# Altium PCB EMG_MainBoard_Layout.PcbDoc (part 5 of 6)
Units mm, origin at the board's own origin, x right, y up, seen from the top; angles counter-clockwise.
Board outline 75 x 40 mm, 4 copper layers (L1 TOP, L2 GND, L3 POWER SIGNAL, L4 BOTTOM GND), stack 1.164 mm thick; 231 components, 136 nets, 808 pads, 80 vias.
Unrouted connection lines stored in the file: 570.
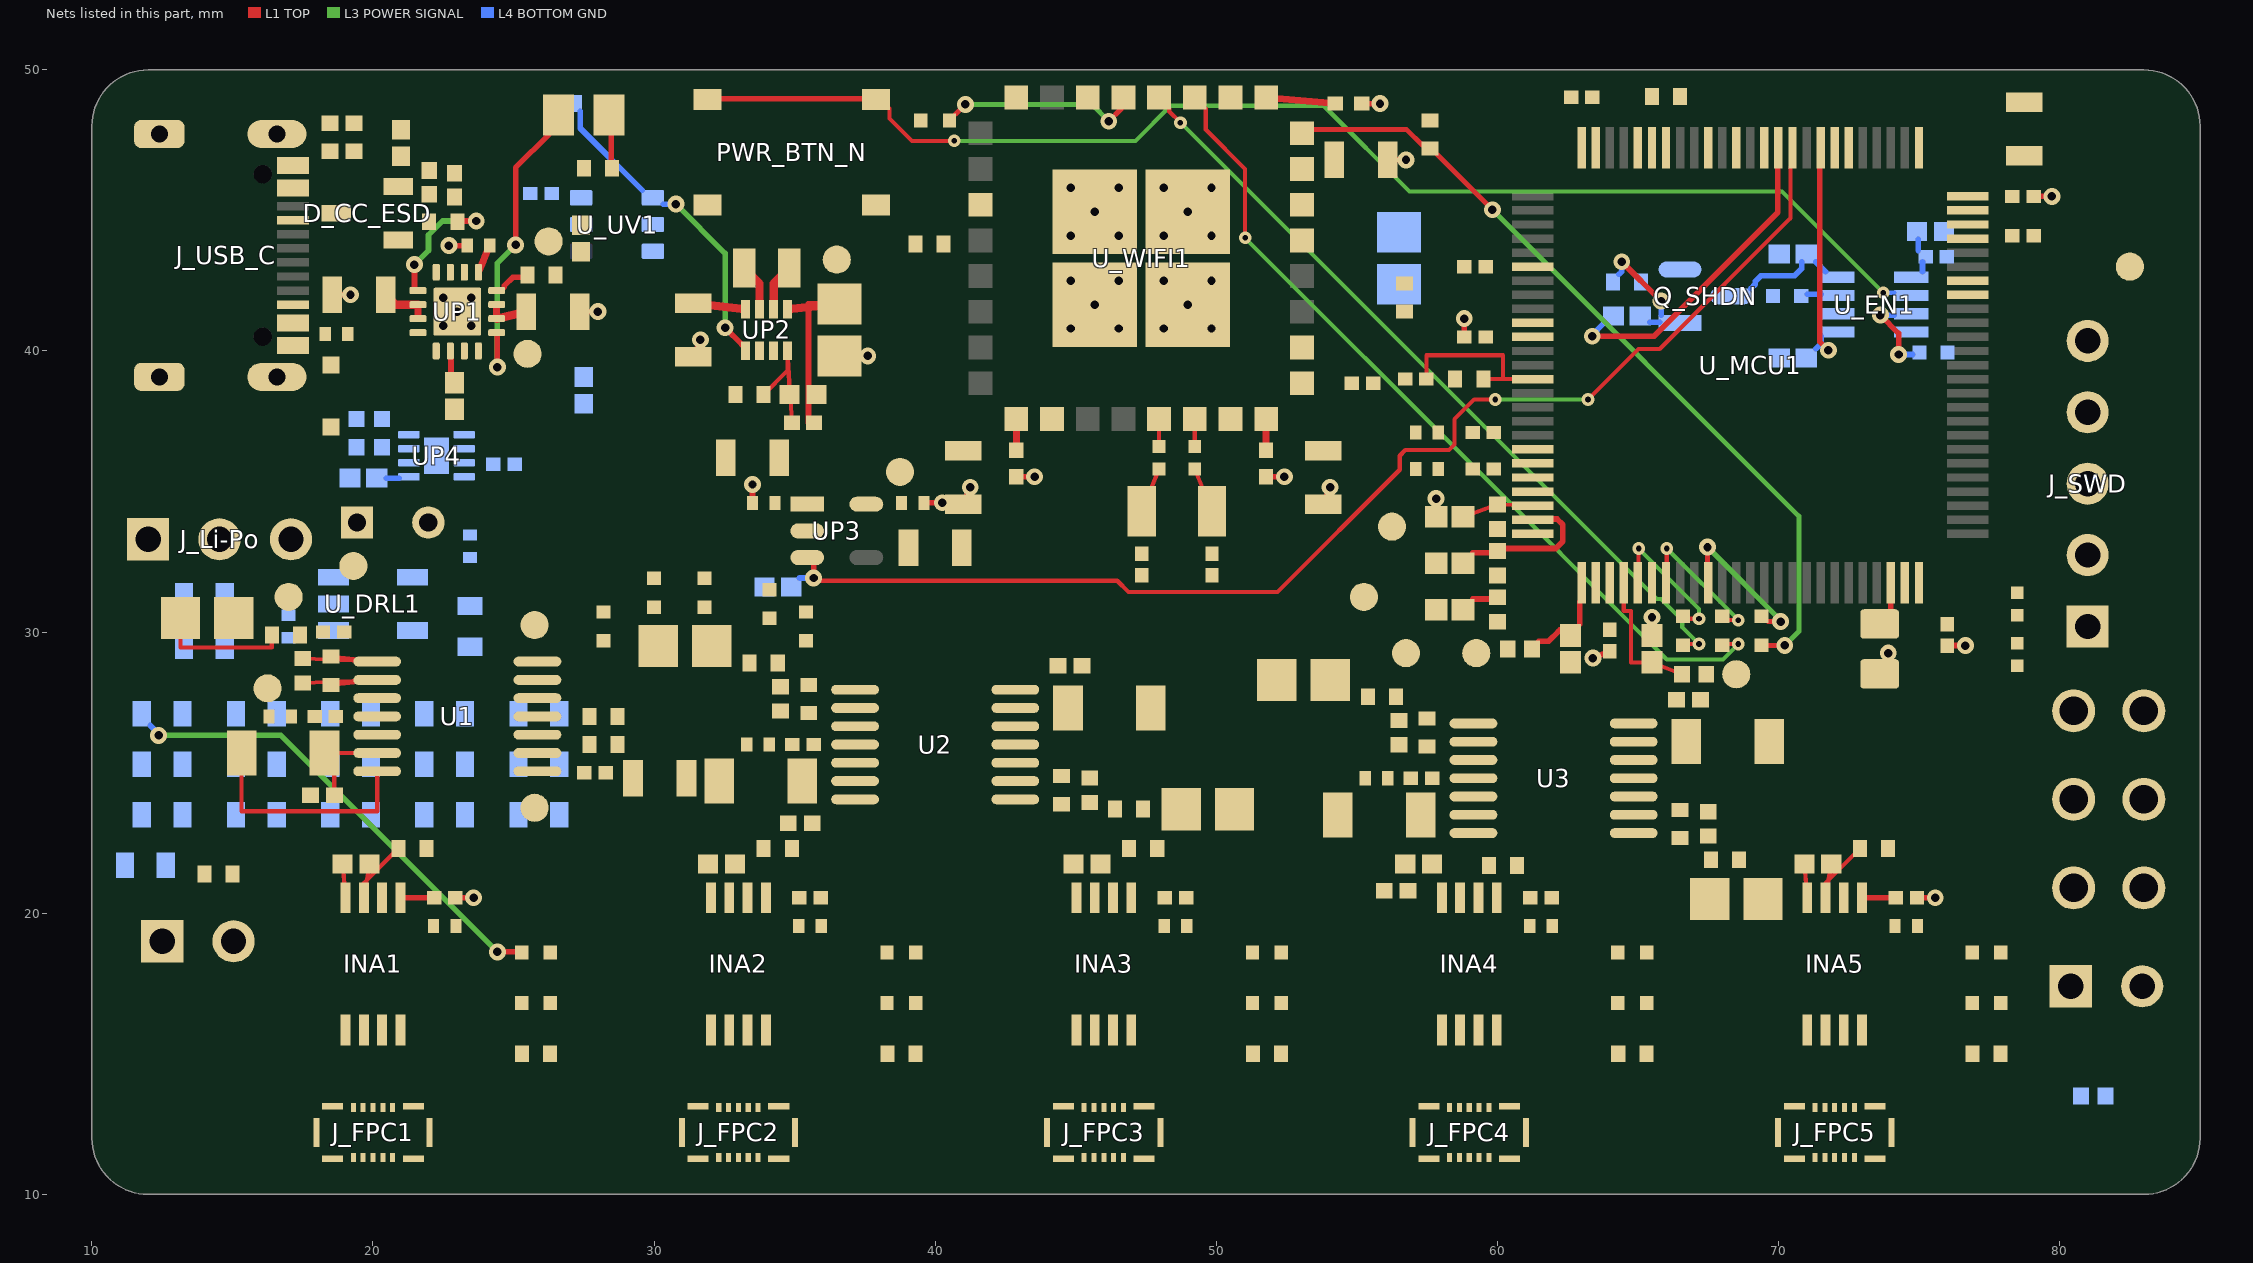
[diagram p5: the nets of this part, all layers, seen from the top]

## Part data (continued)
RDD14: library part EMG_R5_RDD14, "-55℃~+155℃ 50V 5kΩ 63mW Thin Film Resistor ±0.1% ±25ppm/℃ 0402 Chip Resistor - Surface Mount ROH", LCSC Part=C5948099, Manufacturer="Viking Tech", Package=AR0402, Power Rating=0.0625W, Resistance=5KΩ, Temperature="-55°C to +155°C", Temperature Range High=+155°C, Temperature Range Low=-55°C, Tolerance=±0.1%, Voltage Rating=50V, Automotive=No, Automotive Grade="Grade 0", Category="Resistors/Chip Resistor - Surface Mount", ComponentLink2Description=Datasheet, ComponentLink2URL=https://www.viking.com.tw/Templates/att/Thin%20Film%20Resistor%20short%20form.pdf, Composition="Thin Film", Controlled Revision="R5 2026-09-16; project-local frozen symbol/footprint", Device Class L1="Passive Components", Device Class L2=Resistors, Device Class L3="Chip SMD Resistors", Footprint Url=https://www.viking.com.tw/Templates/att/Thin%20Film%20Resistor%20short%20form.pdf, Height=0.35mm, Ipc Land Pattern Name=RESC10050X32, Lead Free=Yes, Manufacturer Part Number=AR02BTC5001, Octopart=https://octopart.com/datasheet/viking-tech/AR02BTC5001, RoHS=TRUE, Series=AR
RDD15: library part EMG_R5_RDD15, Package=None, Availability=Unavailable, Controlled Revision="R5 2026-09-16; project-local frozen symbol/footprint", MP=ERA2ARB103X, Price=None
RG_1: library part EMG_R5_RG_1, "RES SMD 80.6KOHM 0.1% 1/16W 0402", Manufacturer=Yageo, Package=RT0402, Power Rating=0.063W, Resistance=80.6KΩ, Temperature="-55°C to +155°C", Temperature Coefficient="25 ppm/°C", Temperature Range High=+155°C, Temperature Range Low=-55°C, Tolerance=0.001, Voltage Rating=50V, Automotive=No, Category=Res, ComponentLink2Description=Datasheet, ComponentLink2URL=http://www.yageo.com/documents/recent/PYu-RT_1-to-0.01_RoHS_L_9.pdf, Composition="Thin Film", Controlled Revision="R5 2026-09-16; project-local frozen symbol/footprint", Device Class L1="Passive Components", Device Class L2=Resistors, Device Class L3="Chip SMD Resistors", Digikey Description="RES SMD 80.6KOHM 0.1% 1/16W 0402", Footprint Url=http://www.yageo.com/exep/pages/download/literatures/PYu-R_Mount_10.pdf, Height=0.35mm, Ipc Land Pattern Name=RESC10050X30, Lead Free=Yes, Manufacturer Part Number=RT0402BRD0780K6L, Mouser Description="Thin Film Resistors 1/16W 80.6K ohm .1% 25ppm", Octopart=https://octopart.com/rt0402brd0780k6l-yageo-1468076, RoHS=TRUE, Series=RT
RG_2: library part EMG_R5_RG_2, "RES SMD 80.6KOHM 0.1% 1/16W 0402", Manufacturer=Yageo, Package=RT0402, Power Rating=0.063W, Resistance=80.6KΩ, Temperature="-55°C to +155°C", Temperature Coefficient="25 ppm/°C", Temperature Range High=+155°C, Temperature Range Low=-55°C, Tolerance=0.001, Voltage Rating=50V, Automotive=No, Category=Res, ComponentLink2Description=Datasheet, ComponentLink2URL=http://www.yageo.com/documents/recent/PYu-RT_1-to-0.01_RoHS_L_9.pdf, Composition="Thin Film", Controlled Revision="R5 2026-09-16; project-local frozen symbol/footprint", Device Class L1="Passive Components", Device Class L2=Resistors, Device Class L3="Chip SMD Resistors", Digikey Description="RES SMD 80.6KOHM 0.1% 1/16W 0402", Footprint Url=http://www.yageo.com/exep/pages/download/literatures/PYu-R_Mount_10.pdf, Height=0.35mm, Ipc Land Pattern Name=RESC10050X30, Lead Free=Yes, Manufacturer Part Number=RT0402BRD0780K6L, Mouser Description="Thin Film Resistors 1/16W 80.6K ohm .1% 25ppm", Octopart=https://octopart.com/rt0402brd0780k6l-yageo-1468076, RoHS=TRUE, Series=RT
RG_3: library part EMG_R5_RG_3, "RES SMD 80.6KOHM 0.1% 1/16W 0402", Manufacturer=Yageo, Package=RT0402, Power Rating=0.063W, Resistance=80.6KΩ, Temperature="-55°C to +155°C", Temperature Coefficient="25 ppm/°C", Temperature Range High=+155°C, Temperature Range Low=-55°C, Tolerance=0.001, Voltage Rating=50V, Automotive=No, Category=Res, ComponentLink2Description=Datasheet, ComponentLink2URL=http://www.yageo.com/documents/recent/PYu-RT_1-to-0.01_RoHS_L_9.pdf, Composition="Thin Film", Controlled Revision="R5 2026-09-16; project-local frozen symbol/footprint", Device Class L1="Passive Components", Device Class L2=Resistors, Device Class L3="Chip SMD Resistors", Digikey Description="RES SMD 80.6KOHM 0.1% 1/16W 0402", Footprint Url=http://www.yageo.com/exep/pages/download/literatures/PYu-R_Mount_10.pdf, Height=0.35mm, Ipc Land Pattern Name=RESC10050X30, Lead Free=Yes, Manufacturer Part Number=RT0402BRD0780K6L, Mouser Description="Thin Film Resistors 1/16W 80.6K ohm .1% 25ppm", Octopart=https://octopart.com/rt0402brd0780k6l-yageo-1468076, RoHS=TRUE, Series=RT
RG_4: library part EMG_R5_RG_4, "RES SMD 80.6KOHM 0.1% 1/16W 0402", Manufacturer=Yageo, Package=RT0402, Power Rating=0.063W, Resistance=80.6KΩ, Temperature="-55°C to +155°C", Temperature Coefficient="25 ppm/°C", Temperature Range High=+155°C, Temperature Range Low=-55°C, Tolerance=0.001, Voltage Rating=50V, Automotive=No, Category=Res, ComponentLink2Description=Datasheet, ComponentLink2URL=http://www.yageo.com/documents/recent/PYu-RT_1-to-0.01_RoHS_L_9.pdf, Composition="Thin Film", Controlled Revision="R5 2026-09-16; project-local frozen symbol/footprint", Device Class L1="Passive Components", Device Class L2=Resistors, Device Class L3="Chip SMD Resistors", Digikey Description="RES SMD 80.6KOHM 0.1% 1/16W 0402", Footprint Url=http://www.yageo.com/exep/pages/download/literatures/PYu-R_Mount_10.pdf, Height=0.35mm, Ipc Land Pattern Name=RESC10050X30, Lead Free=Yes, Manufacturer Part Number=RT0402BRD0780K6L, Mouser Description="Thin Film Resistors 1/16W 80.6K ohm .1% 25ppm", Octopart=https://octopart.com/rt0402brd0780k6l-yageo-1468076, RoHS=TRUE, Series=RT
RG_5: library part EMG_R5_RG_5, "RES SMD 80.6KOHM 0.1% 1/16W 0402", Manufacturer=Yageo, Package=RT0402, Power Rating=0.063W, Resistance=80.6KΩ, Temperature="-55°C to +155°C", Temperature Coefficient="25 ppm/°C", Temperature Range High=+155°C, Temperature Range Low=-55°C, Tolerance=0.001, Voltage Rating=50V, Automotive=No, Category=Res, ComponentLink2Description=Datasheet, ComponentLink2URL=http://www.yageo.com/documents/recent/PYu-RT_1-to-0.01_RoHS_L_9.pdf, Composition="Thin Film", Controlled Revision="R5 2026-09-16; project-local frozen symbol/footprint", Device Class L1="Passive Components", Device Class L2=Resistors, Device Class L3="Chip SMD Resistors", Digikey Description="RES SMD 80.6KOHM 0.1% 1/16W 0402", Footprint Url=http://www.yageo.com/exep/pages/download/literatures/PYu-R_Mount_10.pdf, Height=0.35mm, Ipc Land Pattern Name=RESC10050X30, Lead Free=Yes, Manufacturer Part Number=RT0402BRD0780K6L, Mouser Description="Thin Film Resistors 1/16W 80.6K ohm .1% 25ppm", Octopart=https://octopart.com/rt0402brd0780k6l-yageo-1468076, RoHS=TRUE, Series=RT
RGN_1: library part EMG_R5_RGN_1, "RES 10.0K OHM 1/16W .1% SMD 0402", Manufacturer=Yageo, Package=RT0402, Power Rating=0.063W, Resistance=10KΩ, Temperature="-55°C to +155°C", Temperature Coefficient="25 ppm/°C", Temperature Range High=+155°C, Temperature Range Low=-55°C, Tolerance=0.001, Voltage Rating=50V, Automotive=No, Category=Res, ComponentLink2Description=Datasheet, ComponentLink2URL=http://www.yageo.com/documents/recent/PYu-RT_1-to-0.01_RoHS_L_9.pdf, Composition="Thin Film", Controlled Revision="R5 2026-09-16; project-local frozen symbol/footprint", Device Class L1="Passive Components", Device Class L2=Resistors, Device Class L3="Chip SMD Resistors", Digikey Description="RES 10.0K OHM 1/16W .1% SMD 0402", Footprint Url=http://www.yageo.com/exep/pages/download/literatures/PYu-R_Mount_10.pdf, Height=0.35mm, Ipc Land Pattern Name=RESC10050X30, Lead Free=Yes, Manufacturer Part Number=RT0402BRD0710KL, Mouser Description="Thin Film Resistors - SMD 10K ohm 0.1% 1/16W", Octopart=https://octopart.com/rt0402brd0710kl-yageo-1181432, RoHS=TRUE, Series=RT
RGN_2: library part EMG_R5_RGN_2, "RES 10.0K OHM 1/16W .1% SMD 0402", Manufacturer=Yageo, Package=RT0402, Power Rating=0.063W, Resistance=10KΩ, Temperature="-55°C to +155°C", Temperature Coefficient="25 ppm/°C", Temperature Range High=+155°C, Temperature Range Low=-55°C, Tolerance=0.001, Voltage Rating=50V, Automotive=No, Category=Res, ComponentLink2Description=Datasheet, ComponentLink2URL=http://www.yageo.com/documents/recent/PYu-RT_1-to-0.01_RoHS_L_9.pdf, Composition="Thin Film", Controlled Revision="R5 2026-09-16; project-local frozen symbol/footprint", Device Class L1="Passive Components", Device Class L2=Resistors, Device Class L3="Chip SMD Resistors", Digikey Description="RES 10.0K OHM 1/16W .1% SMD 0402", Footprint Url=http://www.yageo.com/exep/pages/download/literatures/PYu-R_Mount_10.pdf, Height=0.35mm, Ipc Land Pattern Name=RESC10050X30, Lead Free=Yes, Manufacturer Part Number=RT0402BRD0710KL, Mouser Description="Thin Film Resistors - SMD 10K ohm 0.1% 1/16W", Octopart=https://octopart.com/rt0402brd0710kl-yageo-1181432, RoHS=TRUE, Series=RT
RGN_3: library part EMG_R5_RGN_3, "RES 10.0K OHM 1/16W .1% SMD 0402", Manufacturer=Yageo, Package=RT0402, Power Rating=0.063W, Resistance=10KΩ, Temperature="-55°C to +155°C", Temperature Coefficient="25 ppm/°C", Temperature Range High=+155°C, Temperature Range Low=-55°C, Tolerance=0.001, Voltage Rating=50V, Automotive=No, Category=Res, ComponentLink2Description=Datasheet, ComponentLink2URL=http://www.yageo.com/documents/recent/PYu-RT_1-to-0.01_RoHS_L_9.pdf, Composition="Thin Film", Controlled Revision="R5 2026-09-16; project-local frozen symbol/footprint", Device Class L1="Passive Components", Device Class L2=Resistors, Device Class L3="Chip SMD Resistors", Digikey Description="RES 10.0K OHM 1/16W .1% SMD 0402", Footprint Url=http://www.yageo.com/exep/pages/download/literatures/PYu-R_Mount_10.pdf, Height=0.35mm, Ipc Land Pattern Name=RESC10050X30, Lead Free=Yes, Manufacturer Part Number=RT0402BRD0710KL, Mouser Description="Thin Film Resistors - SMD 10K ohm 0.1% 1/16W", Octopart=https://octopart.com/rt0402brd0710kl-yageo-1181432, RoHS=TRUE, Series=RT
RGN_4: library part EMG_R5_RGN_4, "RES 10.0K OHM 1/16W .1% SMD 0402", Manufacturer=Yageo, Package=RT0402, Power Rating=0.063W, Resistance=10KΩ, Temperature="-55°C to +155°C", Temperature Coefficient="25 ppm/°C", Temperature Range High=+155°C, Temperature Range Low=-55°C, Tolerance=0.001, Voltage Rating=50V, Automotive=No, Category=Res, ComponentLink2Description=Datasheet, ComponentLink2URL=http://www.yageo.com/documents/recent/PYu-RT_1-to-0.01_RoHS_L_9.pdf, Composition="Thin Film", Controlled Revision="R5 2026-09-16; project-local frozen symbol/footprint", Device Class L1="Passive Components", Device Class L2=Resistors, Device Class L3="Chip SMD Resistors", Digikey Description="RES 10.0K OHM 1/16W .1% SMD 0402", Footprint Url=http://www.yageo.com/exep/pages/download/literatures/PYu-R_Mount_10.pdf, Height=0.35mm, Ipc Land Pattern Name=RESC10050X30, Lead Free=Yes, Manufacturer Part Number=RT0402BRD0710KL, Mouser Description="Thin Film Resistors - SMD 10K ohm 0.1% 1/16W", Octopart=https://octopart.com/rt0402brd0710kl-yageo-1181432, RoHS=TRUE, Series=RT
RGN_5: library part EMG_R5_RGN_5, "RES 10.0K OHM 1/16W .1% SMD 0402", Manufacturer=Yageo, Package=RT0402, Power Rating=0.063W, Resistance=10KΩ, Temperature="-55°C to +155°C", Temperature Coefficient="25 ppm/°C", Temperature Range High=+155°C, Temperature Range Low=-55°C, Tolerance=0.001, Voltage Rating=50V, Automotive=No, Category=Res, ComponentLink2Description=Datasheet, ComponentLink2URL=http://www.yageo.com/documents/recent/PYu-RT_1-to-0.01_RoHS_L_9.pdf, Composition="Thin Film", Controlled Revision="R5 2026-09-16; project-local frozen symbol/footprint", Device Class L1="Passive Components", Device Class L2=Resistors, Device Class L3="Chip SMD Resistors", Digikey Description="RES 10.0K OHM 1/16W .1% SMD 0402", Footprint Url=http://www.yageo.com/exep/pages/download/literatures/PYu-R_Mount_10.pdf, Height=0.35mm, Ipc Land Pattern Name=RESC10050X30, Lead Free=Yes, Manufacturer Part Number=RT0402BRD0710KL, Mouser Description="Thin Film Resistors - SMD 10K ohm 0.1% 1/16W", Octopart=https://octopart.com/rt0402brd0710kl-yageo-1181432, RoHS=TRUE, Series=RT
RH_1: library part EMG_R5_RH_1, "RES 26.1kΩ ±0.1% 0.063W 0402", Case Code (Imperial)=0402, Case Code (Metric)=1005, JLCPCB Part=C2075472, Manufacturer=PANASONIC, Max Operating Temperature=155°C, Max Power Dissipation=63mW, Min Operating Temperature=-55°C, Power Rating=62.5mW, Resistance=26.1kR, Resistor Type="Thin Film", Temperature Coefficient=25ppm/°C, Tolerance=0.1%, Voltage Rating=50V, Case/Package=0402, Controlled Revision="R5 2026-09-16; project-local frozen symbol/footprint", Features="Moisture Resistant", Height=0.015inch, Length=0.039inch, Number of Terminations=2, Packaging="Tape and Reel", RoHS Compliant=Yes, Series=ERA-2A, Termination=SMD/SMT, Width=0.5mm
RH_2: library part EMG_R5_RH_2, "RES 26.1kΩ ±0.1% 0.063W 0402", Case Code (Imperial)=0402, Case Code (Metric)=1005, JLCPCB Part=C2075472, Manufacturer=PANASONIC, Max Operating Temperature=155°C, Max Power Dissipation=63mW, Min Operating Temperature=-55°C, Power Rating=62.5mW, Resistance=26.1kR, Resistor Type="Thin Film", Temperature Coefficient=25ppm/°C, Tolerance=0.1%, Voltage Rating=50V, Case/Package=0402, Controlled Revision="R5 2026-09-16; project-local frozen symbol/footprint", Features="Moisture Resistant", Height=0.015inch, Length=0.039inch, Number of Terminations=2, Packaging="Tape and Reel", RoHS Compliant=Yes, Series=ERA-2A, Termination=SMD/SMT, Width=0.5mm
RH_3: library part EMG_R5_RH_3, "RES 26.1kΩ ±0.1% 0.063W 0402", Case Code (Imperial)=0402, Case Code (Metric)=1005, JLCPCB Part=C2075472, Manufacturer=PANASONIC, Max Operating Temperature=155°C, Max Power Dissipation=63mW, Min Operating Temperature=-55°C, Power Rating=62.5mW, Resistance=26.1kR, Resistor Type="Thin Film", Temperature Coefficient=25ppm/°C, Tolerance=0.1%, Voltage Rating=50V, Case/Package=0402, Controlled Revision="R5 2026-09-16; project-local frozen symbol/footprint", Features="Moisture Resistant", Height=0.015inch, Length=0.039inch, Number of Terminations=2, Packaging="Tape and Reel", RoHS Compliant=Yes, Series=ERA-2A, Termination=SMD/SMT, Width=0.5mm
RH_4: library part EMG_R5_RH_4, "RES 26.1kΩ ±0.1% 0.063W 0402", Case Code (Imperial)=0402, Case Code (Metric)=1005, JLCPCB Part=C2075472, Manufacturer=PANASONIC, Max Operating Temperature=155°C, Max Power Dissipation=63mW, Min Operating Temperature=-55°C, Power Rating=62.5mW, Resistance=26.1kR, Resistor Type="Thin Film", Temperature Coefficient=25ppm/°C, Tolerance=0.1%, Voltage Rating=50V, Case/Package=0402, Controlled Revision="R5 2026-09-16; project-local frozen symbol/footprint", Features="Moisture Resistant", Height=0.015inch, Length=0.039inch, Number of Terminations=2, Packaging="Tape and Reel", RoHS Compliant=Yes, Series=ERA-2A, Termination=SMD/SMT, Width=0.5mm
RH_5: library part EMG_R5_RH_5, "RES 26.1kΩ ±0.1% 0.063W 0402", Case Code (Imperial)=0402, Case Code (Metric)=1005, JLCPCB Part=C2075472, Manufacturer=PANASONIC, Max Operating Temperature=155°C, Max Power Dissipation=63mW, Min Operating Temperature=-55°C, Power Rating=62.5mW, Resistance=26.1kR, Resistor Type="Thin Film", Temperature Coefficient=25ppm/°C, Tolerance=0.1%, Voltage Rating=50V, Case/Package=0402, Controlled Revision="R5 2026-09-16; project-local frozen symbol/footprint", Features="Moisture Resistant", Height=0.015inch, Length=0.039inch, Number of Terminations=2, Packaging="Tape and Reel", RoHS Compliant=Yes, Series=ERA-2A, Termination=SMD/SMT, Width=0.5mm
RISET: library part EMG_R5_RISET, Manufacturer=Yageo, Controlled Revision="R5 2026-09-16; project-local frozen symbol/footprint", Part Number=RC0402FR-072K94L
RJ1: library part EMG_R5_RJ1, Manufacturer="Yageo / Phycomp", Controlled Revision="R5 2026-09-16; project-local frozen symbol/footprint", Part Number=RC0402FR-075K1L
RJ2: library part EMG_R5_RJ2, Manufacturer="Yageo / Phycomp", Controlled Revision="R5 2026-09-16; project-local frozen symbol/footprint", Part Number=RC0402FR-075K1L
RL_1: library part EMG_R5_RL_1, "RES SMD 1.07K OHM 0.1% 1/16W", Manufacturer=Yageo, Package=RT0402, Power Rating=0.063W, Resistance=1.07KΩ, Temperature="-55°C to +155°C", Temperature Coefficient="25 ppm/°C", Temperature Range High=+155°C, Temperature Range Low=-55°C, Tolerance=0.001, Voltage Rating=50V, Automotive=No, Category=Res, ComponentLink2Description=Datasheet, ComponentLink2URL=http://www.yageo.com/documents/recent/PYu-RT_1-to-0.01_RoHS_L_9.pdf, Composition="Thin Film", Controlled Revision="R5 2026-09-16; project-local frozen symbol/footprint", Device Class L1="Passive Components", Device Class L2=Resistors, Device Class L3="Chip SMD Resistors", Digikey Description="RES SMD 1.07K OHM 0.1% 1/16W", Footprint Url=http://www.yageo.com/exep/pages/download/literatures/PYu-R_Mount_10.pdf, Height=0.35mm, Ipc Land Pattern Name=RESC10050X30, Lead Free=Yes, Manufacturer Part Number=RT0402BRD071K07L, Mouser Description="Thin Film Resistors 1/16W 1.07K ohm .1% 25ppm", Octopart=https://octopart.com/rt0402brd071k07l-yageo-1400807, RoHS=TRUE, Series=RT
RL_2: library part EMG_R5_RL_2, "RES SMD 1.07K OHM 0.1% 1/16W", Manufacturer=Yageo, Package=RT0402, Power Rating=0.063W, Resistance=1.07KΩ, Temperature="-55°C to +155°C", Temperature Coefficient="25 ppm/°C", Temperature Range High=+155°C, Temperature Range Low=-55°C, Tolerance=0.001, Voltage Rating=50V, Automotive=No, Category=Res, ComponentLink2Description=Datasheet, ComponentLink2URL=http://www.yageo.com/documents/recent/PYu-RT_1-to-0.01_RoHS_L_9.pdf, Composition="Thin Film", Controlled Revision="R5 2026-09-16; project-local frozen symbol/footprint", Device Class L1="Passive Components", Device Class L2=Resistors, Device Class L3="Chip SMD Resistors", Digikey Description="RES SMD 1.07K OHM 0.1% 1/16W", Footprint Url=http://www.yageo.com/exep/pages/download/literatures/PYu-R_Mount_10.pdf, Height=0.35mm, Ipc Land Pattern Name=RESC10050X30, Lead Free=Yes, Manufacturer Part Number=RT0402BRD071K07L, Mouser Description="Thin Film Resistors 1/16W 1.07K ohm .1% 25ppm", Octopart=https://octopart.com/rt0402brd071k07l-yageo-1400807, RoHS=TRUE, Series=RT
RL_3: library part EMG_R5_RL_3, "RES SMD 1.07K OHM 0.1% 1/16W", Manufacturer=Yageo, Package=RT0402, Power Rating=0.063W, Resistance=1.07KΩ, Temperature="-55°C to +155°C", Temperature Coefficient="25 ppm/°C", Temperature Range High=+155°C, Temperature Range Low=-55°C, Tolerance=0.001, Voltage Rating=50V, Automotive=No, Category=Res, ComponentLink2Description=Datasheet, ComponentLink2URL=http://www.yageo.com/documents/recent/PYu-RT_1-to-0.01_RoHS_L_9.pdf, Composition="Thin Film", Controlled Revision="R5 2026-09-16; project-local frozen symbol/footprint", Device Class L1="Passive Components", Device Class L2=Resistors, Device Class L3="Chip SMD Resistors", Digikey Description="RES SMD 1.07K OHM 0.1% 1/16W", Footprint Url=http://www.yageo.com/exep/pages/download/literatures/PYu-R_Mount_10.pdf, Height=0.35mm, Ipc Land Pattern Name=RESC10050X30, Lead Free=Yes, Manufacturer Part Number=RT0402BRD071K07L, Mouser Description="Thin Film Resistors 1/16W 1.07K ohm .1% 25ppm", Octopart=https://octopart.com/rt0402brd071k07l-yageo-1400807, RoHS=TRUE, Series=RT
RL_4: library part EMG_R5_RL_4, "RES SMD 1.07K OHM 0.1% 1/16W", Manufacturer=Yageo, Package=RT0402, Power Rating=0.063W, Resistance=1.07KΩ, Temperature="-55°C to +155°C", Temperature Coefficient="25 ppm/°C", Temperature Range High=+155°C, Temperature Range Low=-55°C, Tolerance=0.001, Voltage Rating=50V, Automotive=No, Category=Res, ComponentLink2Description=Datasheet, ComponentLink2URL=http://www.yageo.com/documents/recent/PYu-RT_1-to-0.01_RoHS_L_9.pdf, Composition="Thin Film", Controlled Revision="R5 2026-09-16; project-local frozen symbol/footprint", Device Class L1="Passive Components", Device Class L2=Resistors, Device Class L3="Chip SMD Resistors", Digikey Description="RES SMD 1.07K OHM 0.1% 1/16W", Footprint Url=http://www.yageo.com/exep/pages/download/literatures/PYu-R_Mount_10.pdf, Height=0.35mm, Ipc Land Pattern Name=RESC10050X30, Lead Free=Yes, Manufacturer Part Number=RT0402BRD071K07L, Mouser Description="Thin Film Resistors 1/16W 1.07K ohm .1% 25ppm", Octopart=https://octopart.com/rt0402brd071k07l-yageo-1400807, RoHS=TRUE, Series=RT
RL_5: library part EMG_R5_RL_5, "RES SMD 1.07K OHM 0.1% 1/16W", Manufacturer=Yageo, Package=RT0402, Power Rating=0.063W, Resistance=1.07KΩ, Temperature="-55°C to +155°C", Temperature Coefficient="25 ppm/°C", Temperature Range High=+155°C, Temperature Range Low=-55°C, Tolerance=0.001, Voltage Rating=50V, Automotive=No, Category=Res, ComponentLink2Description=Datasheet, ComponentLink2URL=http://www.yageo.com/documents/recent/PYu-RT_1-to-0.01_RoHS_L_9.pdf, Composition="Thin Film", Controlled Revision="R5 2026-09-16; project-local frozen symbol/footprint", Device Class L1="Passive Components", Device Class L2=Resistors, Device Class L3="Chip SMD Resistors", Digikey Description="RES SMD 1.07K OHM 0.1% 1/16W", Footprint Url=http://www.yageo.com/exep/pages/download/literatures/PYu-R_Mount_10.pdf, Height=0.35mm, Ipc Land Pattern Name=RESC10050X30, Lead Free=Yes, Manufacturer Part Number=RT0402BRD071K07L, Mouser Description="Thin Film Resistors 1/16W 1.07K ohm .1% 25ppm", Octopart=https://octopart.com/rt0402brd071k07l-yageo-1400807, RoHS=TRUE, Series=RT
Rservo_1: library part EMG_R5_Rservo_1, Manufacturer="Yageo / Phycomp", Controlled Revision="R5 2026-09-16; project-local frozen symbol/footprint", Part Number=RC0402FR-072ML
Rservo_2: library part EMG_R5_Rservo_2, Manufacturer="Yageo / Phycomp", Controlled Revision="R5 2026-09-16; project-local frozen symbol/footprint", Part Number=RC0402FR-072ML
Rservo_3: library part EMG_R5_Rservo_3, Manufacturer="Yageo / Phycomp", Controlled Revision="R5 2026-09-16; project-local frozen symbol/footprint", Part Number=RC0402FR-072ML
Rservo_4: library part EMG_R5_Rservo_4, Manufacturer="Yageo / Phycomp", Controlled Revision="R5 2026-09-16; project-local frozen symbol/footprint", Part Number=RC0402FR-072ML
Rservo_5: library part EMG_R5_Rservo_5, Manufacturer="Yageo / Phycomp", Controlled Revision="R5 2026-09-16; project-local frozen symbol/footprint", Part Number=RC0402FR-072ML
RUP_3: library part EMG_R5_RUP_3, "RES 560kΩ ±1% 0.063W 0402", Case/Package=0402, Max Operating Temperature=155°C, Max Power Dissipation=63mW, Min Operating Temperature=-55°C, Resistance=560kR, Resistor Type="Thick Film", Temperature Coefficient=100ppm/°C, Tolerance=1%, Controlled Revision="R5 2026-09-16; project-local frozen symbol/footprint", Features="Moisture Resistant", Height=0.015inch, Length=0.039inch, Number of Terminations=2, Packaging="Tape and Reel", RoHS Compliant=Yes, Series=AC, Width=0.02inch
RUP_4: library part EMG_R5_RUP_4, "AC0402 100KΩ 0.0625W 1.00%", Manufacturer=Yageo, Package=AC0402, Power Rating=0.0625W, Resistance=100KΩ, Temperature="-55°C to +155°C", Temperature Range High=+155°C, Temperature Range Low=-55°C, Tolerance=0.01, Voltage Rating=50V, Automotive=Yes, Automotive Grade="Grade 0", Category=Res, ComponentLink2Description=Datasheet, ComponentLink2URL=http://www.yageo.com/documents/recent/PYu-AC_51_RoHS_L_6.pdf, Composition="Thick Film", Controlled Revision="R5 2026-09-16; project-local frozen symbol/footprint", Device Class L1="Passive Components", Device Class L2=Resistors, Device Class L3="Chip SMD Resistors", Footprint Url=http://www.yageo.com/exep/pages/download/literatures/PYu-R_Mount_10.pdf, Height=0.37mm, Ipc Land Pattern Name=RESC10050X32, Lead Free=Yes, Manufacturer Part Number=AC0402FR-7D100KL, Octopart=https://octopart.com/ac0402fr-7d100kl-yageo-91024821, RoHS=TRUE, Series=AC
RV1: library part EMG_R5_RV1, "AC0402 100KΩ 0.0625W 1.00%", Manufacturer=Yageo, Package=AC0402, Power Rating=0.0625W, Resistance=100KΩ, Temperature="-55°C to +155°C", Temperature Range High=+155°C, Temperature Range Low=-55°C, Tolerance=0.01, Voltage Rating=50V, Automotive=Yes, Automotive Grade="Grade 0", Category=Res, ComponentLink2Description=Datasheet, ComponentLink2URL=http://www.yageo.com/documents/recent/PYu-AC_51_RoHS_L_6.pdf, Composition="Thick Film", Controlled Revision="R5 2026-09-16; project-local frozen symbol/footprint", Device Class L1="Passive Components", Device Class L2=Resistors, Device Class L3="Chip SMD Resistors", Footprint Url=http://www.yageo.com/exep/pages/download/literatures/PYu-R_Mount_10.pdf, Height=0.37mm, Ipc Land Pattern Name=RESC10050X32, Lead Free=Yes, Manufacturer Part Number=AC0402FR-7D100KL, Octopart=https://octopart.com/ac0402fr-7d100kl-yageo-91024821, RoHS=TRUE, Series=AC
RV2: library part EMG_R5_RV2, "AC0402 100KΩ 0.0625W 1.00%", Manufacturer=Yageo, Package=AC0402, Power Rating=0.0625W, Resistance=100KΩ, Temperature="-55°C to +155°C", Temperature Range High=+155°C, Temperature Range Low=-55°C, Tolerance=0.01, Voltage Rating=50V, Automotive=Yes, Automotive Grade="Grade 0", Category=Res, ComponentLink2Description=Datasheet, ComponentLink2URL=http://www.yageo.com/documents/recent/PYu-AC_51_RoHS_L_6.pdf, Composition="Thick Film", Controlled Revision="R5 2026-09-16; project-local frozen symbol/footprint", Device Class L1="Passive Components", Device Class L2=Resistors, Device Class L3="Chip SMD Resistors", Footprint Url=http://www.yageo.com/exep/pages/download/literatures/PYu-R_Mount_10.pdf, Height=0.37mm, Ipc Land Pattern Name=RESC10050X32, Lead Free=Yes, Manufacturer Part Number=AC0402FR-7D100KL, Octopart=https://octopart.com/ac0402fr-7d100kl-yageo-91024821, RoHS=TRUE, Series=AC
TP_GND: library part EMG_R5_TP_GND, "UltraLow Profile THM Test Point-No Base", Package=None, Check_prices=https://www.snapeda.com/parts/5021/Keystone/view-part/?ref=eda, Controlled Revision="R5 2026-09-16; project-local frozen symbol/footprint", MF="Keystone Electronics", MP=5021, SnapEDA_Link=https://www.snapeda.com/parts/5021/Keystone/view-part/?ref=snap
TP_MCU_BOOT0: library part EMG_R5_TP_MCU_BOOT0, "UltraLow Profile THM Test Point-No Base", Package=None, Check_prices=https://www.snapeda.com/parts/5021/Keystone/view-part/?ref=eda, Controlled Revision="R5 2026-09-16; project-local frozen symbol/footprint", MF="Keystone Electronics", MP=5021, SnapEDA_Link=https://www.snapeda.com/parts/5021/Keystone/view-part/?ref=snap
TP_WIFI_BOOT: library part EMG_R5_TP_WIFI_BOOT, "UltraLow Profile THM Test Point-No Base", Package=None, Check_prices=https://www.snapeda.com/parts/5021/Keystone/view-part/?ref=eda, Controlled Revision="R5 2026-09-16; project-local frozen symbol/footprint", MF="Keystone Electronics", MP=5021, SnapEDA_Link=https://www.snapeda.com/parts/5021/Keystone/view-part/?ref=snap
TP_WIFI_CHIP_EN: library part EMG_R5_TP_WIFI_CHIP_EN, "UltraLow Profile THM Test Point-No Base", Package=None, Check_prices=https://www.snapeda.com/parts/5021/Keystone/view-part/?ref=eda, Controlled Revision="R5 2026-09-16; project-local frozen symbol/footprint", MF="Keystone Electronics", MP=5021, SnapEDA_Link=https://www.snapeda.com/parts/5021/Keystone/view-part/?ref=snap
TP_WIFI_UART_RX: library part EMG_R5_TP_WIFI_UART_RX, "UltraLow Profile THM Test Point-No Base", Package=None, Check_prices=https://www.snapeda.com/parts/5021/Keystone/view-part/?ref=eda, Controlled Revision="R5 2026-09-16; project-local frozen symbol/footprint", MF="Keystone Electronics", MP=5021, SnapEDA_Link=https://www.snapeda.com/parts/5021/Keystone/view-part/?ref=snap
TP_WIFI_UART_TX: library part EMG_R5_TP_WIFI_UART_TX, "UltraLow Profile THM Test Point-No Base", Package=None, Check_prices=https://www.snapeda.com/parts/5021/Keystone/view-part/?ref=eda, Controlled Revision="R5 2026-09-16; project-local frozen symbol/footprint", MF="Keystone Electronics", MP=5021, SnapEDA_Link=https://www.snapeda.com/parts/5021/Keystone/view-part/?ref=snap
U1: library part EMG_R5_U1, "None", Case/Package=TSSOP, Input Bias Current=100pA, Input Offset Voltage (Vos)=4.5mV, Max Operating Temperature=125°C, Max Supply Voltage=6V, Min Operating Temperature=-40°C, Min Supply Voltage=1.8V, Nominal Supply Current=45uA, Output Current=15mA, Power Supply Rejection Ratio (PSRR)=63dB, Voltage Gain=110dB, Amplifier Type="GENERAL PURPOSE", Common Mode Rejection Ratio=56dB, Controlled Revision="R5 2026-09-16; project-local frozen symbol/footprint", Gain Bandwidth Product=1MHz, Lead Free="Lead Free", Mount="Surface Mount", Number of Channels=4, Number of Circuits=4, Number of Elements=4, Number of Pins=14, Packaging="Tape and Reel", RoHS Compliant=Yes, Slew Rate=0.5V/µs, Supply Current=45uA, Technology=CMOS, Unity Gain Bandwidth Product=1MHz
U2: library part EMG_R5_U2, "None", Case/Package=TSSOP, Input Bias Current=100pA, Input Offset Voltage (Vos)=4.5mV, Max Operating Temperature=125°C, Max Supply Voltage=6V, Min Operating Temperature=-40°C, Min Supply Voltage=1.8V, Nominal Supply Current=45uA, Output Current=15mA, Power Supply Rejection Ratio (PSRR)=63dB, Voltage Gain=110dB, Amplifier Type="GENERAL PURPOSE", Common Mode Rejection Ratio=56dB, Controlled Revision="R5 2026-09-16; project-local frozen symbol/footprint", Gain Bandwidth Product=1MHz, Lead Free="Lead Free", Mount="Surface Mount", Number of Channels=4, Number of Circuits=4, Number of Elements=4, Number of Pins=14, Packaging="Tape and Reel", RoHS Compliant=Yes, Slew Rate=0.5V/µs, Supply Current=45uA, Technology=CMOS, Unity Gain Bandwidth Product=1MHz
U3: library part EMG_R5_U3, "None", Case/Package=TSSOP, Input Bias Current=100pA, Input Offset Voltage (Vos)=4.5mV, Max Operating Temperature=125°C, Max Supply Voltage=6V, Min Operating Temperature=-40°C, Min Supply Voltage=1.8V, Nominal Supply Current=45uA, Output Current=15mA, Power Supply Rejection Ratio (PSRR)=63dB, Voltage Gain=110dB, Amplifier Type="GENERAL PURPOSE", Common Mode Rejection Ratio=56dB, Controlled Revision="R5 2026-09-16; project-local frozen symbol/footprint", Gain Bandwidth Product=1MHz, Lead Free="Lead Free", Mount="Surface Mount", Number of Channels=4, Number of Circuits=4, Number of Elements=4, Number of Pins=14, Packaging="Tape and Reel", RoHS Compliant=Yes, Slew Rate=0.5V/µs, Supply Current=45uA, Technology=CMOS, Unity Gain Bandwidth Product=1MHz
U_DRL1: library part EMG_MCP6401_SOT23_5_DRL, "MCP6401 single operational amplifier, SOT-23-5; optional DRL, DNP", Manufacturer="Microchip Technology", Package="SOT-23-5 / OT", Assembly Variant="PROTO_1_REMOTE_NTC: Not Fitted", Manufacturer Part Number=MCP6401T-E/OT, Population="DNP - optional DRL"
U_EN1: library part EMG_R5_U_EN1, "Pushbutton On / Off  Controller with µP Interrupt, 8-pin SOT23 (TS8-8), -40 to 85 degC, Pb-Free, Mini Tape and Reel", Manufacturer="Linear Technology", Code_JEDEC=MO-193, ComponentLink1Description="Manufacturer URL", ComponentLink1URL=http://www.linear.com/, ComponentLink2Description=Datasheet, ComponentLink2URL=http://cds.linear.com/docs/en/datasheet/2954fb.pdf, ComponentLink3Description="Package Specification", ComponentLink3URL=http://cds.linear.com/docs/en/packaging/SOT_8_05-08-1637.pdf, Controlled Revision="R5 2026-09-16; project-local frozen symbol/footprint", DatasheetVersion="Rev. B", Mounting Technology="Surface Mount", Number of Supplies(#)=1, PackageDescription="8-Pin Plastic TSOT-23, Body 2.9 x 1.63 mm, Pitch 0.65 mm", PackageReference=TS8-8, PackageVersion="Rev. A, 08/2010", Packing="Mini Tape and Reel", PartNumber=LTC2954ITS8-1#TRMPBF, RoHS=TRUE
U_MCU1: library part EMG_R5_U_MCU1, "Integrated Circuit", Manufacturer_Name=STMicroelectronics, Mouser Part Number=511-STM32U575VIT6, Arrow Part Number=STM32U575VIT6, Arrow Price/Stock=https://www.arrow.com/en/products/stm32u575vit6/stmicroelectronics.html?utm_currency=USD&region=nac, Controlled Revision="R5 2026-09-16; project-local frozen symbol/footprint", Datasheet Link=https://www.st.com/resource/en/datasheet/stm32u575ag.pdf, Height=1.6mm, Manufacturer_Part_Number=STM32U575VIT6, Mouser Price/Stock=https://www.mouser.co.uk/ProductDetail/STMicroelectronics/STM32U575VIT6?qs=DRkmTr78QAR9I8TWG1L7Og%3D%3D
U_UV1: library part EMG_R5_U_UV1, "Low Quiescent Current, Programmable-Delay Supervisory Circuit, 1 Supply Monitored, -40 to 125 degC, 6-pin SOT-23 (DBV), Green (RoHS & no Sb/Br)", Manufacturer="Texas Instruments", Rating=Catalog, Threshold Voltage 1 (typ)(Typ)(V)=3.07, # of Supplies Monitored=1, Code_JEDEC=MO-178-AB*, ComponentLink1Description=Datasheet, ComponentLink1URL=http://www.ti.com/general/docs/lit/getliterature.tsp?genericPartNumber=TPS3808G33&fileType=pdf, Controlled Revision="R5 2026-09-16; project-local frozen symbol/footprint", DatasheetVersion=SBVS050J, Iq(Typ)(uA)=2.4, Mounting Technology="Surface Mount", Output Driver Type / Reset Output="Active-low, Open-drain", PackageDescription="6-Pin Plastic Small-Outline Package, 2.9 x 1.6 mm Body, 0.95 mm Pitch, 2.8 mm Lead Span", PackageReference=DBV0006A, PackageVersion="revK, Mar-2006", PartNumber=TPS3808G33DBVR, Reset Threshold Accuracy(%)=0.5, SubFamily="Supervisor and Reset IC", Time Delay(ms)=Programmable, VCC(Max)(V)=6.5, VCC(Min)(V)=1.7
U_WIFI1: library part EMG_R5_U_WIFI1, "Integrated Circuit", Manufacturer_Name=STMicroelectronics, Arrow Part Number=ST67W611M1A6BTR, Arrow Price/Stock=https://www.arrow.com/en/products/st67w611m1a6btr/stmicroelectronics.html?utm_currency=USD&region=nac, Controlled Revision="R5 2026-09-16; project-local frozen symbol/footprint", Datasheet Link=https://www.st.com/resource/en/datasheet/st67w611m1.pdf, Height=2.37mm, Manufacturer_Part_Number=ST67W611M1A6BTR
UP1: library part EMG_R5_UP1, "BQ24072T single-cell Li-ion charger with dynamic power path; OUT tracks battery +225mV with 3.4V minimum regulation under USB power", Manufacturer="Texas Instruments", Over Voltage Protection=N, Code_JEDEC=MO-220, ComponentLink1Description=Datasheet, ComponentLink1URL=http://www.ti.com/general/docs/lit/getliterature.tsp?genericPartNumber=BQ24072T&fileType=pdf, Controlled Revision="R5 2026-09-16; project-local frozen symbol/footprint", DatasheetVersion=SLUS937A, Eco-Plan="Green (RoHS & no Sb/Br)", Lead Acid=N, Li-Ion=Y, Li-Polymer=Y, Manufacturer Part Number=BQ24072TRGTR, Mounting Technology="Surface Mount", NiCd=N, NiMH=N, PackageDescription="16-Pin Plastic Quad Flat No-Lead, 3 x 3 mm Body, 0.5 mm Pitch, 1.7 x 1.7 mm Exposed Pad", PackageReference=RGT0016C, PackageVersion="revH, Oct-2011", PartNumber=BQ24072TRGTR, SubFamily="Battery Charge Management", Vin(Min)(V)=4.3
UP2: library part EMG_R5_UP2, "1.5-A output current, high-power-density buck-boost converter", Package="SOT-583 Texas Instruments", Check_prices=https://www.snapeda.com/parts/TPS631000DRLR/Texas+Instruments/view-part/?ref=eda, Controlled Revision="R5 2026-09-16; project-local frozen symbol/footprint", MF="Texas Instruments", MP=TPS631000DRLR, SnapEDA_Link=https://www.snapeda.com/parts/TPS631000DRLR/Texas+Instruments/view-part/?ref=snap
UP3: library part EMG_R5_UP3, "IC REG LINEAR 3V 300MA SOT23-5", Controlled Revision="R5 2026-09-16; project-local frozen symbol/footprint", RoHS Compliant=Yes
UP4: library part EMG_R5_UP4, "3ÂµA 1-Cell/2-Cell Fuel Gauge with ModelGauge", Package="TDFN-8 Maxim", Availability="In Stock", Check_prices=https://www.snapeda.com/parts/MAX17048G+T10/Analog+Devices/view-part/?ref=eda, Controlled Revision="R5 2026-09-16; project-local frozen symbol/footprint", MF="Analog Devices", MP=MAX17048G+T10, Price=None, Purchase-URL=https://pricing.snapeda.com/search/part/MAX17048G+T10/?ref=eda, SnapEDA_Link=https://www.snapeda.com/parts/MAX17048G+T10/Analog+Devices/view-part/?ref=snap
X_WIFI_32K: library part EMG_R5_X_WIFI_32K, "Epson FC-135 32.768 kHz 9 pF +/-20 ppm, ESR 70 kohm max, 3.2x1.5 mm, 2 terminals", Frequency="32.768 kHz", Load Capacitance="9 pF", Manufacturer="Seiko Epson Corporation", Package="SMD3215 / 3.2 x 1.5 mm / 2 terminal", Temperature Range="-40 to +85 degC", Tolerance="+/-20 ppm at 25 degC, 0.1 uW", Controlled Revision="R5 2026-09-16; project-local frozen symbol/footprint", Datasheet Link=https://download.epsondevice.com/td/pdf/td_xtal_32khz/FC-135_Q13FC13500003_en.pdf, Drive Level="0.1 uW nominal; 0.5 uW maximum", ESR="70 kohm maximum", Height="0.8 +/-0.1 mm", Manufacturer Part Number=Q13FC13500003, Packaging Note="Q13FC13500003xx; xx=00 is 3000/reel"

## Free pads (board coordinates)
  round 1 smd paste-0.5 mask+0.05: TP_3V0_ANA(38.75,35.7) TP_3V3_DIG(36.5,43.25) TP_GND_ANA(16.25,28) TP_GND_DIG(82.5,43) TP_GND_PWR(19.3,32.35) TP_VBAT_CELL(17,31.25) TP_VBUS(26.25,43.9) TP_VOUT_1(56.25,33.75) TP_VOUT_2(59.25,29.25) TP_VOUT_3(56.75,29.25) TP_VOUT_4(55.25,31.25) TP_VOUT_5(68.5,28.5) TP_VREF_A(25.75,23.75) TP_VREF_B_SRC(25.75,30.25) TP_VSYS(25.5,39.9)

## Via types
v1: diameter 0.6, hole 0.3, L1 TOP to L4 BOTTOM GND, 52 vias
v2: diameter 0.45, hole 0.2, L1 TOP to L4 BOTTOM GND, 12 vias
v3: diameter 0.6, hole 0.3, L1 TOP to L4 BOTTOM GND, tented top, 11 vias
v4: diameter 0.5, hole 0.3, L1 TOP to L4 BOTTOM GND, 5 vias

## Nets (pads, with @x,y where several pads share a name; then routed paths per layer and width w, separated by ;. In a path a pad name is that pad's centre, name@x,y a point inside that pad or via, vN(x,y) a via of type N, cw(c..) or ccw(c..) an arc to the next point about the centre after c; other vN are vias at no path point)
3V0_ANA: C1_MCU.1 C2_MCU.2 C3_MCU.1 C4_MCU.2 C_DRL_DEC.1 CCU1.1 CCU2.2 CCU3.2 CCU4.1 CCU5.2 CCU6.1 CCU7.2 CCU8.1 CCU9.2 CCU10.1 Cdiv.2 CU_11.2 CU_12.2 CU_14.2 CU_21.1 CU_22.1 CU_24.1 CUP5_2.2 CUP5_3.2 INA1.5 INA2.5 INA3.5 INA4.5 INA5.5 J_FPC1.P1_1 J_FPC1.P1_2 J_FPC1.P1_3 J_FPC2.P1_1 J_FPC2.P1_2 J_FPC2.P1_3 J_FPC3.P1_1 J_FPC3.P1_2 J_FPC3.P1_3 J_FPC4.P1_1 J_FPC4.P1_2 J_FPC4.P1_3 J_FPC5.P1_1 J_FPC5.P1_2 J_FPC5.P1_3 pad.TP_3V0_ANA RV2.1 U1.4 U2.4 U3.4 U_DRL1.5 U_MCU1.21 U_MCU1.22 UP3.5 | length 2.4
  L1 TOP w0.2: INA1.5@20.975,20.55 CCU1.1@22.171,20.55 ; INA5.5@72.975,20.55 CCU10.1@74.171,20.55
3V3_DIG: C_MCU_BULK.1 C_MCU_VDD1.2 C_MCU_VDD2.2 C_MCU_VDD3.2 C_MCU_VDD4.1 C_MCU_VDD5.1 C_VBAT.2 C_VDDUSB.1 C_WIFI_BULK.2 C_WIFI_VDD33.1 C_WIFI_VDD33_HF.1 C_WIFI_VDDIO1.2 C_WIFI_VDDIO1_HF.1 C_WIFI_VDDIO2.2 C_WIFI_VDDIO2_HF.2 CUP4.1 CUP4_FB.2 CUP5_1.1 CUP5_5.1 J_SWD.1 pad.TP_3V3_DIG R_AL.2 R_INT_PULLUP.1 R_KILL_PU.2 R_NRST.2 R_PGOOD.2 R_SCL.2 R_SDA.2 R_WIFI_BOOT_OVR.1 RUP_3.2 U_MCU1.6 U_MCU1.11 U_MCU1.28 U_MCU1.50 U_MCU1.73 U_MCU1.75 U_MCU1.100 U_WIFI1.9 U_WIFI1.16 U_WIFI1.25 UP2.1 UP2.6 UP3.1 | length 16.7
  L1 TOP w0.2: CUP4_FB.2@35.69,37.45 35.495,37.45 35.495,41.676 CUP4.1@36.6,41.676 35.489,41.676 35.489,38.45 RUP_3.2@35.779,38.45
  L1 TOP w0.25: C_WIFI_VDDIO1_HF.1@42.885,36.475 U_WIFI1.9@42.885,37.584 ; C_WIFI_VDD33_HF.1@51.775,36.475 U_WIFI1.16@51.775,37.584 ; U_WIFI1.25@51.775,49.016 C_WIFI_VDDIO2_HF.2@54.225,48.8
  L1 TOP w0.3: UP2.1@34.75,41.485 CUP4.1@36.6,41.676
ADC_EMG1: C_ADC1.1 R_ADC1.2 U_MCU1.23 | length 2.6
  L1 TOP w0.15: C_ADC1.1@58.777,34.1 R_ADC1.2@60,34.535 U_MCU1.23@61.262,34.5
ADC_EMG2: C_ADC2.1 R_ADC2.2 U_MCU1.24 | length 3.8
  L1 TOP w0.2: C_ADC2.1@59.125,32.825 59.525,32.825 R_ADC2.2@59.725,32.825 ; R_ADC2.2@60.275,32.975 62.075,32.975 62.325,33.225 62.325,33.825 62.125,34.025 U_MCU1.24@61.975,34.025
ADC_EMG3: C_ADC3.1 R_ADC3.2 U_MCU1.25 | length 0.6
  L1 TOP w0.2: C_ADC3.1@59.125,31.175 59.525,31.175 R_ADC3.2@59.725,31.175
ADC_EMG4: C_ADC4.1 R_ADC4.2 U_MCU1.26 | length 1.7
  L1 TOP w0.2: R_ADC4.2@61.475,29.675 61.825,29.675 62.175,30.024 C_ADC4.1@62.225,30.075 ; C_ADC4.1@62.925,30.275 U_MCU1.26@62.925,31.075
ADC_EMG5: C_ADC5.1 R_ADC5.2 U_MCU1.29 | length 6.1
  L1 TOP w0.15: U_MCU1.29@64.5,31.762 64.5,30.75 64.75,30.75 64.75,28.923 C_ADC5.1@65.5,28.923 ; C_ADC5.1@65.5,28.923 R_ADC5.2@66.565,28.5 C_ADC5.1@65.5,28.923
AFE_EN: R_EN_PD.1 U_MCU1.85 UP3.3 | length 43.8
  L1 TOP w0.15: v1@35.925,31.825 46.475,31.825 46.875,31.425 52.175,31.425 56.525,35.775 56.525,36.275 56.725,36.475 58.275,36.475 58.475,36.675 58.475,37.575 59.175,38.275 59.525,38.275 v2(59.925,38.275) ; v2(63.225,38.275) 65.025,40.075 65.775,40.075 70.425,44.725 U_MCU1.85@70.425,46.525
  L1 TOP w0.2: v1(35.675,31.925) UP3.3@35.675,32.425
  L3 POWER SIGNAL w0.15: v2(59.925,38.275) v2(63.225,38.275)
  L4 BOTTOM GND w0.2: R_EN_PD.1@35.175,31.925 v1(35.675,31.925)
BAT_TEMP: J_Li-Po.2 R_TH_BAT.2 R_TS_BOTTOM.2 R_TS_SER.1 R_TS_TOP.1
DRL_AMP_OUT: C_DRL_FB.2 R_DRL_FB.2 R_DRL_OUT1.1 U_DRL1.1
DRL_LIMIT_MID: R_DRL_OUT1.2 R_DRL_OUT2.1
DRL_LIMITED: R_DRL_OUT2.2 R_DRL_SEL.1
DRL_SUM: C_DRL_FB.1 R_DRL_FB.1 R_DRL_VA1.2 R_DRL_VA2.2 R_DRL_VA3.2 R_DRL_VA4.2 R_DRL_VA5.2 R_DRL_VB1.2 R_DRL_VB2.2 R_DRL_VB3.2 R_DRL_VB4.2 R_DRL_VB5.2 R_DRL_VC1.2 R_DRL_VC2.2 R_DRL_VC3.2 R_DRL_VC4.2 R_DRL_VC5.2 U_DRL1.4
FG_ALRT: R_AL.1 U_MCU1.81 UP4.5 | length 0.4
  L4 BOTTOM GND w0.2: R_AL.1@20.475,35.475 UP4.5@20.925,35.475
GND: C1_EN1.1 C1_MCU.2 C2_EN1.2 C2_MCU.1 C3_EN1.1 C3_MCU.2 C4_MCU.1 C_ADC1.2 C_ADC2.2 C_ADC3.2 C_ADC4.2 C_ADC5.2 C_BAT.2 C_DRL_DEC.2 C_IN_.2 C_MCU_BULK.2 C_MCU_VDD1.1 C_MCU_VDD2.1 C_MCU_VDD3.1 C_MCU_VDD4.2 C_MCU_VDD5.2 C_NRST.2 C_OUT_.2 C_UV_BYPASS.2 C_VBAT.1 C_VBUS.1 C_VDDUSB.2 C_WIFI_BULK.1 C_WIFI_EN.2 C_WIFI_VDD33.2 C_WIFI_VDD33_HF.2 C_WIFI_VDDIO1.1 C_WIFI_VDDIO1_HF.2 C_WIFI_VDDIO2.1 C_WIFI_VDDIO2_HF.1 C_WIFI_X32_IN.1 C_WIFI_X32_OUT.1 CCU1.2 CCU2.1 CCU3.1 CCU4.2 CCU5.1 CCU6.2 CCU7.1 CCU8.2 CCU9.1 CCU10.2 Cdiv.1 Cdiv_1.1 Cdiv_10uF.1 CU6_1.1 CU_11.1 CU_12.1 CU_14.1 CU_21.2 CU_22.2 CU_24.2 CUP4.2 CUP4_1.2 CUP5_1.2 CUP5_2.1 CUP5_3.1 CUP5_5.2 D_CC_ESD.3 D_VBUS.2 INA1.1 INA1.4 INA2.1 INA2.4 INA3.1 INA3.4 INA4.1 INA4.4 INA5.1 INA5.4 J_FPC1.1 J_FPC1.3 J_FPC1.5 J_FPC1.7 J_FPC1.9 J_FPC1.10 J_FPC1.P2_1 J_FPC1.P2_2 J_FPC1.P2_3 J_FPC2.1 J_FPC2.3 J_FPC2.5 J_FPC2.7 J_FPC2.9 J_FPC2.10 J_FPC2.P2_1 J_FPC2.P2_2 J_FPC2.P2_3 J_FPC3.1 J_FPC3.3 J_FPC3.5 J_FPC3.7 J_FPC3.9 J_FPC3.10 J_FPC3.P2_1 J_FPC3.P2_2 J_FPC3.P2_3 J_FPC4.1 J_FPC4.3 J_FPC4.5 J_FPC4.7 J_FPC4.9 J_FPC4.10 J_FPC4.P2_1 J_FPC4.P2_2 J_FPC4.P2_3 J_FPC5.1 J_FPC5.3 J_FPC5.5 J_FPC5.7 J_FPC5.9 J_FPC5.10 J_FPC5.P2_1 J_FPC5.P2_2 J_FPC5.P2_3 J_Li-Po.1 J_SWD.3 J_USB_C.A1_B12 J_USB_C.B1_A12 J_USB_C.SH1 J_USB_C.SH2 J_USB_C.SH3 J_USB_C.SH4 MCU_VCAP.1 pad.TP_GND_ANA pad.TP_GND_DIG pad.TP_GND_PWR PWR_BTN_N.C PWR_BTN_N.D Q_SHDN.2 R_EN_PD.2 R_LIM.1 R_MCU_BOOT0_PD.1 R_SHDN_PD.1 R_TH_BAT.1 R_TMR.1 R_TS_BOTTOM.1 R_WIFI_BOOT_PD.1 R_WIFI_CS_PD.2 R_WIFI_EN_PD.2 RISET.2 RJ1.1 RJ2.1 RUP_4.1 RV1.2 TP_GND.TP U1.11 U2.11 U3.11 U_DRL1.2 U_EN1.4 U_MCU1.10 U_MCU1.19 U_MCU1.20 U_MCU1.27 U_MCU1.49 U_MCU1.74 U_MCU1.99 U_UV1.2 U_WIFI1.10 U_WIFI1.15 U_WIFI1.18 U_WIFI1.26 U_WIFI1.30 U_WIFI1.32 U_WIFI1.33 U_WIFI1.34 U_WIFI1.35 U_WIFI1.36 UP1.4 UP1.5 UP1.8 UP1.15 UP1.17@23,41.4 UP2.7 UP3.2 UP4.1 UP4.4 UP4.6 UP4.9 | length 14.8
  L1 TOP w0.2: C_BAT.2@18.55,42 v1(19.2,42) ; v3(22.7,43.75) C_IN_.2@23.35,43.75 ; CCU1.2@22.929,20.55 v3(23.579,20.55) ; C_OUT_.2@27.35,41.4 v1(28,41.4) ; CUP4_1.2@31.4,39.8 v1(31.649,40.401) ; CUP5_1.2@33.5,34.6 v1(33.5,35.25) ; CUP4.2@36.6,39.824 v1(37.6,39.824) ; CUP5_2.1@39.6,34.6 v3(40.25,34.6) ; C_WIFI_VDDIO1.1@41,34.55 v1(41.249,35.151) ; C_WIFI_VDDIO1_HF.2@42.885,35.525 v3(43.535,35.525) ; C_WIFI_VDD33_HF.2@51.775,35.525 v3(52.425,35.525) ; C_WIFI_VDD33.2@53.8,34.55 v1(54.049,35.151) ; C_WIFI_VDDIO2_HF.1@55.175,48.8 v3(55.825,48.8) ; C_WIFI_VDDIO2.1@56.1,46.8 v1(56.75,46.8) ; C_ADC1.2@57.823,34.1 v1(57.823,34.75) ; C_MCU_VDD1.1@58.821,40.5 v3(58.821,41.15) ; v3(63.399,29.073) C_MCU_VDD2.1@64,29.321 ; C_ADC5.2@65.5,29.877 v1(65.5,30.527) ; MCU_VCAP.1@73.6,28.512 v1(73.906,29.251) ; CCU10.2@74.929,20.55 v3(75.579,20.55) ; C_MCU_VDD3.1@76,29.521 v3(76.65,29.521) ; C_MCU_VDD4.2@79.079,45.5 v3(79.729,45.5)
  other v1: 44.83,40.8 46.53,40.8 48.13,40.8 49.83,40.8 45.68,41.65 48.98,41.65 44.83,42.5 46.53,42.5 48.13,42.5 49.83,42.5 44.83,44.1 46.53,44.1 48.13,44.1 49.83,44.1 45.68,44.95 48.98,44.95 44.83,45.8 46.53,45.8 48.13,45.8 49.83,45.8
  other v4: 22.5,40.9 23.5,40.9 23,41.4 22.5,41.9 23.5,41.9
I2C_SCL: R_SCL.1 U_MCU1.95 UP4.7
I2C_SDA: R_SDA.1 U_MCU1.96 UP4.8
INA_OUT_1: CL_1.2 INA1.8 RH_1.1 Rservo_1.2 | length 1.2
  L1 TOP w0.15: RH_1.1@18.921,21.75 INA1.8@19.025,20.55
INA_OUT_2: CL_2.2 INA2.8 RH_2.1 Rservo_2.2
INA_OUT_3: CL_3.2 INA3.8 RH_3.1 Rservo_3.2
INA_OUT_4: CL_4.2 INA4.8 RH_4.1 Rservo_4.2
INA_OUT_5: CL_5.2 INA5.8 RH_5.1 Rservo_5.2 | length 1.2
  L1 TOP w0.15: RH_5.1@70.921,21.75 INA5.8@71.025,20.55
KILL_CTRL: Q_SHDN.3 R_KILL_PU.1 U_EN1.8 | length 2.9
  L4 BOTTOM GND w0.2: 69.025,42.225 69.175,42.375 69.175,42.475 69.375,42.675 70.575,42.675 70.825,42.925 R_KILL_PU.1@70.825,43.175 ; R_KILL_PU.1@71.325,43.175 U_EN1.8@71.675,42.825
MCU_BOOT0: R_MCU_BOOT0_PD.2 TP_MCU_BOOT0.TP U_MCU1.94
MCU_NRST: C_NRST.1 J_SWD.5 R_NRST.1 U_MCU1.14 | length 7.2
  L1 TOP w0.15: C_NRST.1@57.479,39 57.479,39.85 60.2,39.85 60.2,39 U_MCU1.14@61.262,39 R_NRST.1@59.5,39
MCU_PWR_INT_N: R_INT_PULLUP.2 U_EN1.5 U_MCU1.83 | length 7.4
  L1 TOP w0.2: U_MCU1.83@71.475,46.525 71.475,40.325 v1(71.775,40.025)
  L4 BOTTOM GND w0.2: R_INT_PULLUP.2@71.325,40.075 71.525,40.275 U_EN1.5@71.525,40.525 ; v1@71.575,40.225 v1(71.775,40.025)
MCU_SHUTDOWN: R_SHDN_G.2 U_MCU1.86 | length 10.6
  L1 TOP w0.2: v1(63.375,40.525) 65.575,40.525 69.975,44.925 U_MCU1.86@69.975,46.525
  L4 BOTTOM GND w0.2: v1(63.375,40.525) 63.375,40.575 R_SHDN_G.2@63.775,40.975
MCU_SPI_MISO: R_SPI_MISO.2 U_MCU1.31
MCU_SPI_MOSI: R_SPI_MOSI.2 U_MCU1.32 | length 4.5
  L1 TOP w0.15: U_MCU1.32@66.025,32.475 v2(66.025,32.975) ; R_SPI_MOSI.2@68.225,30.425 v2(68.575,30.425)
  L3 POWER SIGNAL w0.15: v2(66.025,32.975) v2(68.575,30.425)
MCU_SPI_SCK: R_SPI_SCK.2 U_MCU1.30 | length 4.2
  L1 TOP w0.15: U_MCU1.30@65.025,32.475 v2(65.025,32.975) ; R_SPI_SCK.2@66.825,30.475 v2(67.175,30.475)
  L3 POWER SIGNAL w0.15: v2(65.025,32.975) 67.175,30.825 v2(67.175,30.475)
MCU_SWCLK: J_SWD.4 U_MCU1.76
MCU_SWDIO: J_SWD.2 U_MCU1.72
MCU_VCAP: MCU_VCAP.2 U_MCU1.48 | length 1.6
  L1 TOP w0.2: MCU_VCAP.2@73.6,30.288 74,30.688 U_MCU1.48@74,31.762
MCU_WIFI_CS: R_SPI_CS.2 U_MCU1.35 | length 4.7
  L1 TOP w0.18: U_MCU1.35@67.475,32.475 v1(67.475,33.025) ; R_SPI_CS.2@69.625,30.375 v1(70.075,30.375)
  L3 POWER SIGNAL w0.18: v1(67.475,33.025) 70.075,30.425 v1(70.075,30.375)
MCU_WIFI_UART_RX: R_WIFI_UART_RX_LINK.2 U_MCU1.69
MCU_WIFI_UART_TX: R_WIFI_UART_TX_LINK.2 U_MCU1.68
NetC1_EN1_2: C1_EN1.2 R_EN1_1.2 U_EN1.1 | length 0.7
  L4 BOTTOM GND w0.2: C1_EN1.2@74.975,43.575 R_EN1_1.2@74.975,43.975 ; U_EN1.1@75.125,42.825 C1_EN1.2@75.125,43.175
NetC2_EN1_1: C2_EN1.1 U_EN1.3 | length 2.7
  L1 TOP w0.2: v1(73.625,41.275) 74.275,40.625 v1(74.275,39.875)
  L4 BOTTOM GND w0.2: v1(73.625,41.275) U_EN1.3@74.125,41.275 ; v1(74.275,39.875) C2_EN1.1@74.775,39.875
NetC3_EN1_2: C3_EN1.2 U_EN1.7 | length 0.5
  L4 BOTTOM GND w0.2: C3_EN1.2@71.025,42.025 U_EN1.7@71.525,42.025
NetC_WIFI_X32_IN_2: C_WIFI_X32_IN.2 R_WIFI_X32_IN.1 X_WIFI_32K.1 | length 1.6
  L1 TOP w0.15: R_WIFI_X32_IN.1@49.235,35.8 X_WIFI_32K.1@49.85,34.3
NetC_WIFI_X32_OUT_2: C_WIFI_X32_OUT.2 R_WIFI_X32_OUT.1 X_WIFI_32K.2 | length 1.6
  L1 TOP w0.15: X_WIFI_32K.2@47.35,34.3 R_WIFI_X32_OUT.1@47.965,35.8
NetCH_1_2: CH_1.2 RG_1.1 RGN_1.2 U1.2 | length 4.3
  L1 TOP w0.15: CH_1.2@17.5,28.193 U1.2@20.15,28.3 RG_1.1@18.5,28.125
NetCH_2_2: CH_2.2 RG_2.1 RGN_2.2 U2.2
NetCH_3_2: CH_3.2 RG_3.1 RGN_3.2 U2.9
NetCH_4_2: CH_4.2 RG_4.1 RGN_4.2 U3.2
NetCH_5_2: CH_5.2 RG_5.1 RGN_5.2 U3.9
NetCL_1_1: CL_1.1 RGN_1.1 | length 4.7
  L1 TOP w0.15: CL_1.1@13.15,30.5 13.15,29.45 16.4,29.45 RGN_1.1@16.4,29.9
NetCL_2_1: CL_2.1 RGN_2.1
NetCL_3_1: CL_3.1 RGN_3.1
NetCL_4_1: CL_4.1 RGN_4.1
NetCL_5_1: CL_5.1 RGN_5.1
NetCservo_1_1: Cservo_1.1 Rservo_1.1 U1.6 | length 4.9
  L1 TOP w0.15: Cservo_1.1@18.275,25.7 U1.6@20.15,25.7 18.625,25.7 Rservo_1.1@18.625,24.2
NetCservo_2_1: Cservo_2.1 Rservo_2.1 U2.6
NetCservo_3_1: Cservo_3.1 Rservo_3.1 U2.13
NetCservo_4_1: Cservo_4.1 Rservo_4.1 U3.6
NetCservo_5_1: Cservo_5.1 Rservo_5.1 U3.13
NetCUP4_FB_1: CUP4_FB.1 RUP_3.1 RUP_4.2 UP2.8 | length 6.1
  L1 TOP w0.15: RUP_4.2@33.9,38.45 34.75,39.3 UP2.8@34.75,40.015 ; RUP_3.1@34.821,38.45 UP2.8@34.75,40.015 ; CUP4_FB.1@34.91,37.45 UP2.8@34.75,40.015
NetD_CC_ESD_1: D_CC_ESD.1 J_USB_C.A5 RJ1.2
NetD_CC_ESD_2: D_CC_ESD.2 J_USB_C.B5 RJ2.2
NetINA1_2: INA1.2 RDD2.2
NetINA1_3: INA1.3 RDD1.2 RDD3.2
NetINA1_7: INA1.7 RH_1.2 RL_1.1 | length 3.5
  L1 TOP w0.15: RH_1.2@19.879,21.75 INA1.7@19.675,20.55 19.675,21.075 RL_1.1@20.9,22.3
NetINA2_2: INA2.2 RDD5.2
NetINA2_3: INA2.3 RDD4.2 RDD6.2
NetINA2_7: INA2.7 RH_2.2 RL_2.1
NetINA3_2: INA3.2 RDD8.2
NetINA3_3: INA3.3 RDD7.2 RDD9.2
NetINA3_7: INA3.7 RH_3.2 RL_3.1
NetINA4_2: INA4.2 RDD11.2
NetINA4_3: INA4.3 RDD10.2 RDD12.2
NetINA4_7: INA4.7 RH_4.2 RL_4.1
NetINA5_2: INA5.2 RDD14.2
NetINA5_3: INA5.3 RDD13.2 RDD15.2
NetINA5_7: INA5.7 RH_5.2 RL_5.1 | length 3.5
  L1 TOP w0.15: RH_5.2@71.879,21.75 INA5.7@71.675,20.55 71.675,21.075 RL_5.1@72.9,22.3
NetJ_FPC1_8: J_FPC1.8 R_VREF1.2
NetJ_FPC2_8: J_FPC2.8 R_VREF2.2
NetJ_FPC3_8: J_FPC3.8 R_VREF3.2
NetJ_FPC4_8: J_FPC4.8 R_VREF4.2
NetJ_FPC5_8: J_FPC5.8 R_VREF5.2
NetJ_REF_1: J_REF.1 J_REF.2 R_DRL_SEL.2 R_ref.1
NetJP_WIFI_BOOT_1: JP_WIFI_BOOT.1 R_WIFI_BOOT_OVR.2
NetL1_1: L1.1 UP2.3 | length 1.7
  L1 TOP w0.3: L1.1@33.2,42.95 33.75,42.4 UP2.3@33.75,41.485
NetL1_2: L1.2 UP2.2 | length 1.7
  L1 TOP w0.3: UP2.2@34.25,41.485 34.25,42.4 L1.2@34.8,42.95
NetLED_CHG_A: LED_CHG.A R_CHG_LED.2 | length 1
  L1 TOP w0.2: R_CHG_LED.2@28.475,46.775 LED_CHG.A@28.475,47.725
NetLED_CHG_C: LED_CHG.C UP1.9 | length 10.2
  L1 TOP w0.2: v1(24.425,39.425) UP1.9@24.425,40.575 ; v1(25.075,43.775) 25.075,44.1 25.075,46.525 LED_CHG.C@26.275,47.725
  L3 POWER SIGNAL w0.2: v1(24.425,39.425) 24.425,43.125 v1(25.075,43.775)
NetPWR_BTN_N_A: PWR_BTN_N.A PWR_BTN_N.B U_EN1.2 | length 44.8
  L1 TOP w0.15: PWR_BTN_N.B@38.375,48.625 38.375,48.275 39.175,47.475 v2(40.675,47.475)
  L1 TOP w0.2: PWR_BTN_N.A@32.375,48.975 PWR_BTN_N.B@37.425,48.975
  L3 POWER SIGNAL w0.15: v2(40.675,47.475) 47.125,47.475 48.375,48.725 53.825,48.725 56.875,45.675 59.525,45.675 70.125,45.675 v2(73.725,42.075)
  L4 BOTTOM GND w0.15: v2(73.725,42.075) U_EN1.2@74.125,42.075